# EAGLE board all-in-one (EAGLE 8.0.0)
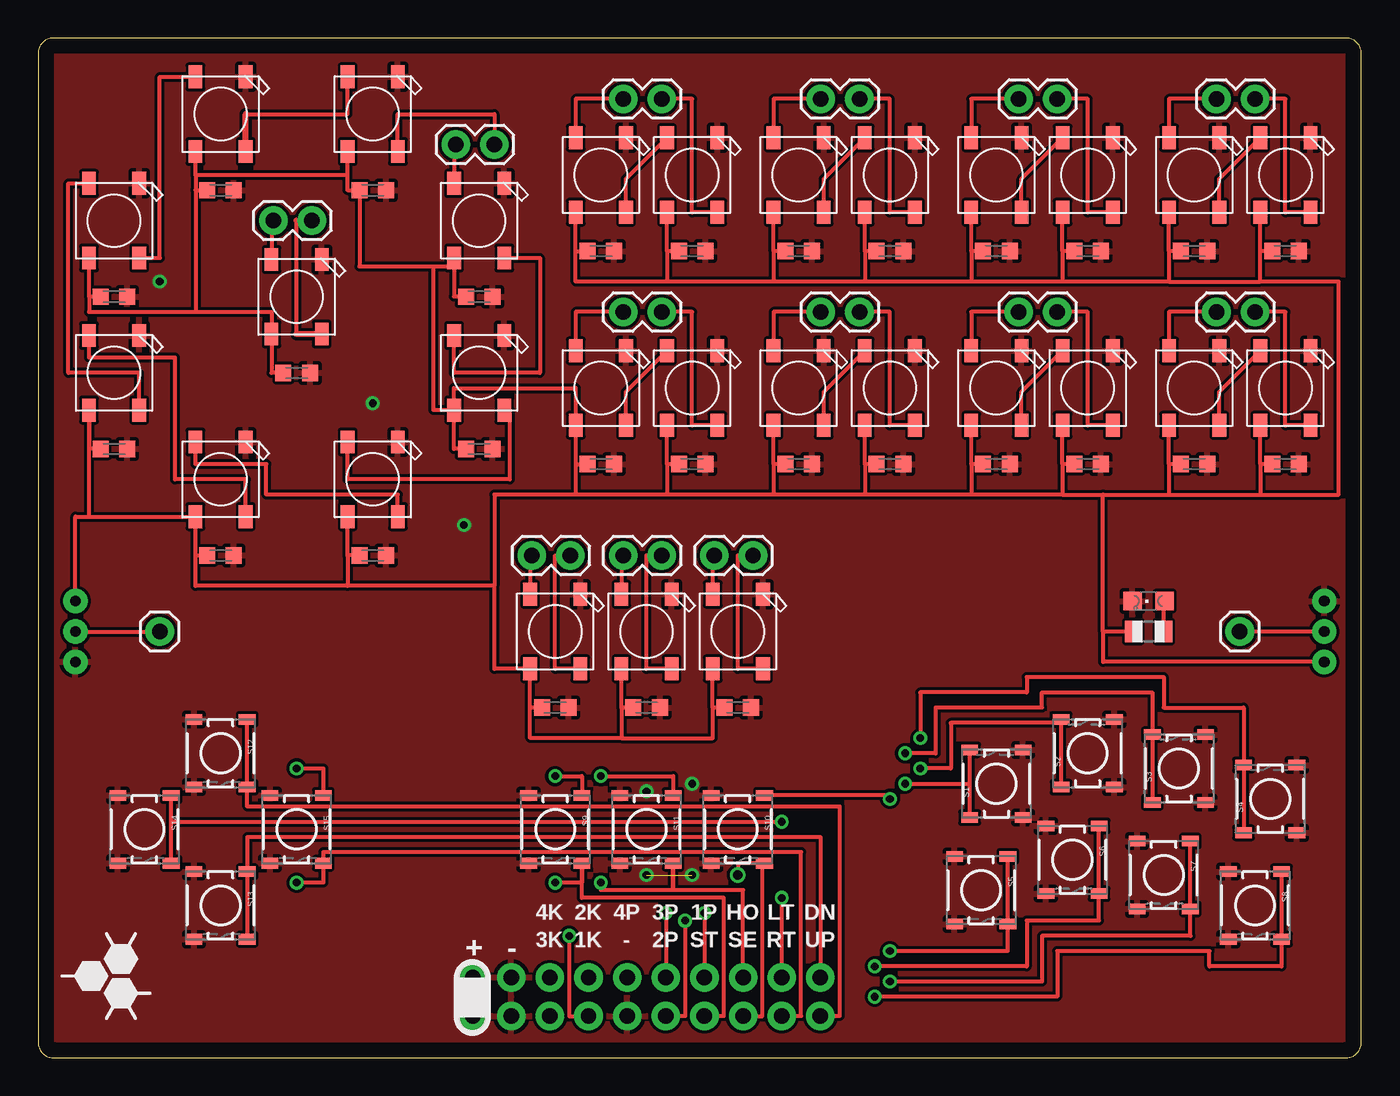
[diagram p0: board, top side]
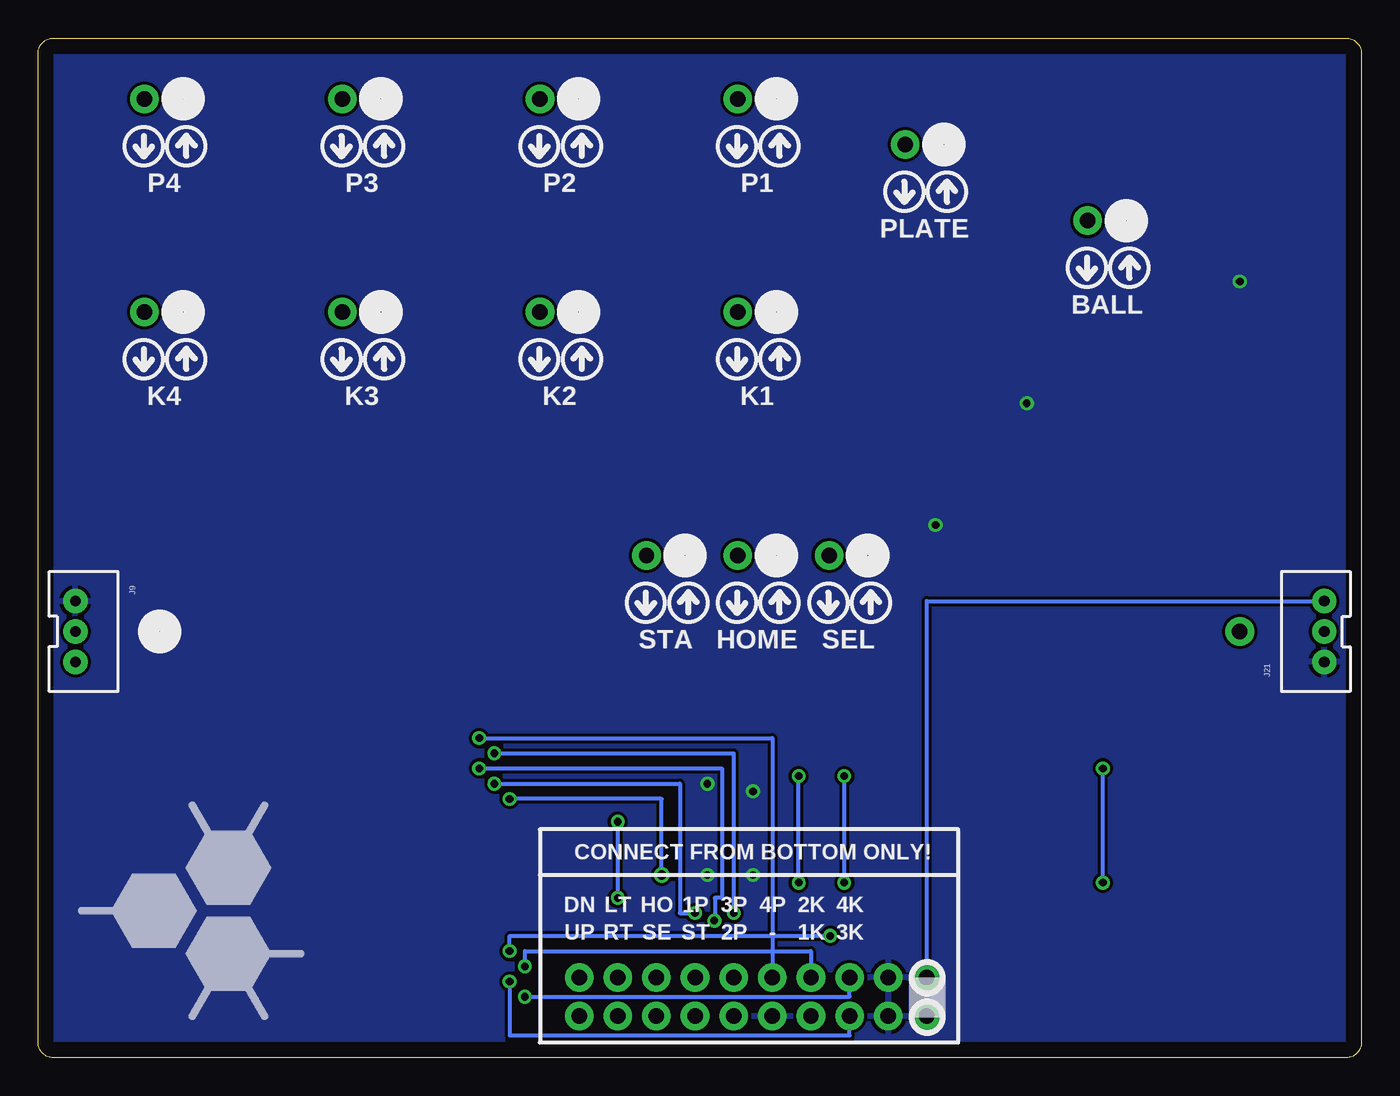
[diagram p1: board, bottom side, seen from below]

Size 87 x 67 mm. Coordinates in mm from the lower left corner, seen from the top.
Outline: 0,66 0,1 arc90 1,0 86,0 arc90 87,1 87,66 arc90 86,67 1,67 arc90 0,66
Copper layers (1*16): Top 0.035mm / dielectric 1.5mm / Bottom 0.035mm
Design rules "default": minimum track width 10mil, minimum drill 24mil, track to track 8mil, track to pad 8mil, pad to pad 8mil, via to via 8mil, smd to smd 8mil, copper to edge 40mil, drill to drill 8mil, minimum pad ring 10mil, minimum via ring 8mil, stop-mask expansion 4mil, vias tented up to drill 0mil, thermal gap 10mil

## Footprints (pad centres in the part's own frame; a part is rotated, then mirrored left to right if it is on the bottom)
C0603K = smd 1.05 x 1.08: 1 -0.875,0; 2 0.875,0
1X02 = drill 1.016 pad 1.88: 1 0,0; 2 2.54,0
JST-3-PTH-VERT = drill 0.7 pad 1.6: 1 -2,-0.55; 2 0,-0.55; 3 2,-0.55
1X01 = drill 1.016 pad 1.88: 1 0,0
WS2812B = smd 1.5 x 0.9: 1-VDD 2.45,-1.65; 2-DOUT 2.45,1.65; 3-GND -2.45,1.65; 4-DIN -2.45,-1.65
CHIPLED_0805 = smd 1.2 x 1.2: A 0,-1.05; C 0,1.05
R0805 = smd 1.1 x 1.4: 1 -1,0; 2 1,0
TACTILE_SWITCH_SMD_4.5MM = smd 0.7 x 1.1: 1 2.225,1.75; 2 2.225,-1.75; 3 -2.225,-1.75; 4 -2.225,1.75
2X10_ROUND_NOSILK = drill 1.016 pad 1.88: 1 -11.43,-1.27; 2 -11.43,1.27; 3 -8.89,-1.27; 4 -8.89,1.27; 5 -6.35,-1.27; 6 -6.35,1.27; 7 -3.81,-1.27; 8 -3.81,1.27; 9 -1.27,-1.27; 10 -1.27,1.27; 11 1.27,-1.27; 12 1.27,1.27; 13 3.81,-1.27; 14 3.81,1.27; 15 6.35,-1.27; 16 6.35,1.27; 17 8.89,-1.27; 18 8.89,1.27; 19 11.43,-1.27; 20 11.43,1.27

## Placement (x,y rotation side)
C1  0.1uf  [C0603K]  37,39 0 top
C2  0.1uf  [C0603K]  43,39 0 top
C3  0.1uf  [C0603K]  37,53 0 top
C4  0.1uf  [C0603K]  43,53 0 top
C5  0.1uf  [C0603K]  50,39 0 top
C6  0.1uf  [C0603K]  56,39 0 top
C7  0.1uf  [C0603K]  50,53 0 top
C8  0.1uf  [C0603K]  56,53 0 top
C9  0.1uf  [C0603K]  63,39 0 top
C10  0.1uf  [C0603K]  69,39 0 top
C11  0.1uf  [C0603K]  63,53 0 top
C12  0.1uf  [C0603K]  69,53 0 top
C13  0.1uf  [C0603K]  76,39 0 top
C14  0.1uf  [C0603K]  82,39 0 top
C15  0.1uf  [C0603K]  76,53 0 top
C16  0.1uf  [C0603K]  82,53 0 top
C17  0.1uf  [C0603K]  34,23 0 top
C18  0.1uf  [C0603K]  46,23 0 top
C19  0.1uf  [C0603K]  40,23 0 top
C20  0.1uf  [C0603K]  17,45 0 top
C21  0.1uf  [C0603K]  29,50 0 top
C22  0.1uf  [C0603K]  29,40 0 top
C23  0.1uf  [C0603K]  22,33 0 top
C24  0.1uf  [C0603K]  12,33 0 top
C25  0.1uf  [C0603K]  5,40 0 top
C26  0.1uf  [C0603K]  5,50 0 top
C27  0.1uf  [C0603K]  12,57 0 top
C28  0.1uf  [C0603K]  22,57 0 top
J1  K1  [1X02]  41,49 180 top
J2  P1  [1X02]  41,63 180 top
J3  K2  [1X02]  54,49 180 top
J4  P2  [1X02]  54,63 180 top
J5  K3  [1X02]  67,49 180 top
J6  P3  [1X02]  67,63 180 top
J7  K4  [1X02]  80,49 180 top
J8  P4  [1X02]  80,63 180 top
J9  led  [JST-3-PTH-VERT]  84,28 270 bottom
J10  DIN  [1X01]  79,28 0 top
J11  START  [1X02]  35,33 180 top
J12  SELECT  [1X02]  47,33 180 top
J13  HOME  [1X02]  41,33 180 top
J14  BALLTOP  [1X02]  18,55 180 top
J15  PLATE  [1X02]  30,60 180 top
J20  DOUT  [1X01]  8,28 0 top
J21  led  [JST-3-PTH-VERT]  3,28 90 bottom
L1  WS2812B  [WS2812B]  37,44 270 top
L2  WS2812B  [WS2812B]  43,44 270 top
L3  WS2812B  [WS2812B]  37,58 270 top
L4  WS2812B  [WS2812B]  43,58 270 top
L5  WS2812B  [WS2812B]  50,44 270 top
L6  WS2812B  [WS2812B]  56,44 270 top
L7  WS2812B  [WS2812B]  50,58 270 top
L8  WS2812B  [WS2812B]  56,58 270 top
L9  WS2812B  [WS2812B]  63,44 270 top
L10  WS2812B  [WS2812B]  69,44 270 top
L11  WS2812B  [WS2812B]  63,58 270 top
L12  WS2812B  [WS2812B]  69,58 270 top
L13  WS2812B  [WS2812B]  76,44 270 top
L14  WS2812B  [WS2812B]  82,44 270 top
L15  WS2812B  [WS2812B]  76,58 270 top
L16  WS2812B  [WS2812B]  82,58 270 top
L17  WS2812B  [WS2812B]  34,28 270 top
L18  WS2812B  [WS2812B]  46,28 270 top
L19  WS2812B  [WS2812B]  40,28 270 top
L20  WS2812B  [WS2812B]  17,50 270 top
L21  WS2812B  [WS2812B]  29,55 270 top
L22  WS2812B  [WS2812B]  29,45 270 top
L23  WS2812B  [WS2812B]  22,38 270 top
L24  WS2812B  [WS2812B]  12,38 270 top
L25  WS2812B  [WS2812B]  5,45 270 top
L26  WS2812B  [WS2812B]  5,55 270 top
L27  WS2812B  [WS2812B]  12,62 270 top
L28  WS2812B  [WS2812B]  22,62 270 top
LED1  [CHIPLED_0805]  73,30 90 top
R1  [R0805]  73,28 0 top
S1  P1  [TACTILE_SWITCH_SMD_4.5MM]  63,18 90 top
S2  P2  [TACTILE_SWITCH_SMD_4.5MM]  69,20 90 top
S3  P3  [TACTILE_SWITCH_SMD_4.5MM]  75,19 90 top
S4  P4  [TACTILE_SWITCH_SMD_4.5MM]  81,17 90 top
S5  K1  [TACTILE_SWITCH_SMD_4.5MM]  62,11 270 top
S6  K2  [TACTILE_SWITCH_SMD_4.5MM]  68,13 270 top
S7  K3  [TACTILE_SWITCH_SMD_4.5MM]  74,12 270 top
S8  K4  [TACTILE_SWITCH_SMD_4.5MM]  80,10 270 top
S9  START  [TACTILE_SWITCH_SMD_4.5MM]  34,15 270 top
S10  SELECT  [TACTILE_SWITCH_SMD_4.5MM]  46,15 270 top
S11  HOME  [TACTILE_SWITCH_SMD_4.5MM]  40,15 270 top
S12  UP  [TACTILE_SWITCH_SMD_4.5MM]  12,20 270 top
S13  DOWN  [TACTILE_SWITCH_SMD_4.5MM]  12,10 270 top
S14  LEFT  [TACTILE_SWITCH_SMD_4.5MM]  7,15 270 top
S15  RIGHT  [TACTILE_SWITCH_SMD_4.5MM]  17,15 270 top
U$1  20 pin breakout  [2X10_ROUND_NOSILK]  40,4 180 top

## Library data of the parts
C1-C28 = rcl
J1-J15 J20 J21 U$1 = SparkFun-Connectors
L1-L28 R1 = adafruit
LED1 = led
S1-S15 = SparkFun-Switches; PROD_ID: SWCH-09213

## Nets
1K: S5.1 S5.4 U$1.14
1P: S1.1 S1.4 U$1.7
2K: S6.1 S6.4 U$1.13
2P: S2.1 S2.4 U$1.10
3K: S7.1 S7.4 U$1.16
3P: S3.1 S3.4 U$1.9
4K: S8.1 S8.4 U$1.15
4P: S4.1 S4.4 U$1.11
DOWN: S13.1 S13.4 U$1.1
GND: C1.2 C2.2 C3.2 C4.2 C5.2 C6.2 C7.2 C8.2 C9.2 C10.2 C11.2 C12.2 C13.2 C14.2 C15.2 C16.2 C17.2 C18.2 C19.2 C20.2 C21.2 C22.2 C23.2 C24.2 C25.2 C26.2 C27.2 C28.2 J9.1 J21.1 L1.3-GND L2.3-GND L3.3-GND L4.3-GND L5.3-GND L6.3-GND L7.3-GND L8.3-GND L9.3-GND L10.3-GND L11.3-GND L12.3-GND L13.3-GND L14.3-GND L15.3-GND L16.3-GND L17.3-GND L18.3-GND L19.3-GND L20.3-GND L21.3-GND L22.3-GND L23.3-GND L24.3-GND L25.3-GND L26.3-GND L27.3-GND L28.3-GND LED1.C S1.2 S1.3 S2.2 S2.3 S3.2 S3.3 S4.2 S4.3 S5.2 S5.3 S6.2 S6.3 S7.2 S7.3 S8.2 S8.3 S9.2 S9.3 S10.2 S10.3 S11.2 S11.3 S12.2 S12.3 S13.2 S13.3 S14.2 S14.3 S15.2 S15.3 U$1.12 U$1.17 U$1.18
HOME: S11.1 S11.4 U$1.5
LEFT: S14.1 S14.4 U$1.3
N$1: J1.2 L1.4-DIN
N$2: J1.1 L2.2-DOUT
N$3: L1.2-DOUT L2.4-DIN
N$4: J20.1 J21.2
N$5: J2.2 L3.4-DIN
N$6: J2.1 L4.2-DOUT
N$7: J3.2 L5.4-DIN
N$8: L5.2-DOUT L6.4-DIN
N$9: J3.1 L6.2-DOUT
N$10: J4.2 L7.4-DIN
N$11: J4.1 L8.2-DOUT
N$12: J5.2 L9.4-DIN
N$13: J5.1 L10.2-DOUT
N$14: J6.2 L11.4-DIN
N$15: J6.1 L12.2-DOUT
N$16: J7.2 L13.4-DIN
N$17: J7.1 L14.2-DOUT
N$18: L9.2-DOUT L10.4-DIN
N$19: L11.2-DOUT L12.4-DIN
N$20: L13.2-DOUT L14.4-DIN
N$21: L15.2-DOUT L16.4-DIN
N$22: L7.2-DOUT L8.4-DIN
N$23: L3.2-DOUT L4.4-DIN
N$24: J8.2 L15.4-DIN
N$25: J8.1 L16.2-DOUT
N$26: J11.1 L17.2-DOUT
N$27: J9.2 J10.1
N$28: J11.2 L17.4-DIN
N$29: J12.2 L18.4-DIN
N$30: J12.1 L18.2-DOUT
N$31: J13.2 L19.4-DIN
N$32: J13.1 L19.2-DOUT
N$33: J14.2 L20.4-DIN
N$34: J14.1 L20.2-DOUT
N$35: J15.2 L21.4-DIN
N$36: J15.1 L28.2-DOUT
N$37: LED1.A R1.2
N$38: L27.2-DOUT L28.4-DIN
N$39: L26.2-DOUT L27.4-DIN
N$40: L25.2-DOUT L26.4-DIN
N$41: L24.2-DOUT L25.4-DIN
N$42: L23.2-DOUT L24.4-DIN
N$43: L22.2-DOUT L23.4-DIN
N$44: L21.2-DOUT L22.4-DIN
RIGHT: S15.1 S15.4 U$1.4
SELECT: S10.1 S10.4 U$1.6
START: S9.1 S9.4 U$1.8
UP: S12.1 S12.4 U$1.2
VCC: C1.1 C2.1 C3.1 C4.1 C5.1 C6.1 C7.1 C8.1 C9.1 C10.1 C11.1 C12.1 C13.1 C14.1 C15.1 C16.1 C17.1 C18.1 C19.1 C20.1 C21.1 C22.1 C23.1 C24.1 C25.1 C26.1 C27.1 C28.1 J9.3 J21.3 L1.1-VDD L2.1-VDD L3.1-VDD L4.1-VDD L5.1-VDD L6.1-VDD L7.1-VDD L8.1-VDD L9.1-VDD L10.1-VDD L11.1-VDD L12.1-VDD L13.1-VDD L14.1-VDD L15.1-VDD L16.1-VDD L17.1-VDD L18.1-VDD L19.1-VDD L20.1-VDD L21.1-VDD L22.1-VDD L23.1-VDD L24.1-VDD L25.1-VDD L26.1-VDD L27.1-VDD L28.1-VDD R1.1 U$1.19 U$1.20

## Tracks (layer width: path | path; a pad name or v marks a point on that pad's centre or on a via)
1K  (via drill 0.5)
  Top 0.254: v34.92,8 34.92,2.73 U$1.14 | v56,7 63.75,7 S5.1 S5.4
  Bottom 0.254: v56,7 56,8 v34.92,8
1P  (via drill 0.5)
  Top 0.254: v43.81,9.5 U$1.7 | S1.4 61.25,18 | v57,18 61.25,18 | 61.25,18 S1.1
  Bottom 0.254: v57,18 44.81,18 44.81,9.5 v43.81,9.5
2K  (via drill 0.5)
  Top 0.254: v55,6 65,6 65,9 69.75,9 S6.1 S6.4
  Bottom 0.254: v55,6 55,7 36.19,7 U$1.13
2P  (via drill 0.5)
  Top 0.254: v58,19 60,19 60,22 67.09,22 S2.1 S2.4 | v42.54,9 42.54,2.73 U$1.10
  Bottom 0.254: v58,19 42.04,19 42.04,10.5 42.5,10.5 42.5,9 v42.54,9
3K  (via drill 0.5)
  Top 0.254: v56,5 66,5 66,8 75.75,8 S7.1 S7.4
  Bottom 0.254: v56,5 56,1.46 33.65,1.46 U$1.16
3P  (via drill 0.5)
  Top 0.254: v57,20 59,20 59,23 66,23 66,24 73.25,24 S3.1 S3.4 | v41.27,9.5 U$1.9
  Bottom 0.254: v57,20 41.27,20 v41.27,9.5
4K  (via drill 0.5)
  Top 0.254: v55,4 67,4 67,7 77,7 77,6 81.75,6 S8.1 S8.4
  Bottom 0.254: v55,4 33.65,4 U$1.15
4P  (via drill 0.5)
  Top 0.254: v58,21 58,24 65,24 65,25 74,25 74,23 79.25,23 S4.1 S4.4
  Bottom 0.254: v58,21 38.73,21 U$1.11
DOWN
  Top 0.254: U$1.1 51.43,14.5 13.75,14.5 S13.4 S13.1
GND  (via drill 0.5)  (1 unrouted)
  other vias: 22,43 28,35 43,12 40,12 43,18 40,17.5 8,51
  pour Top: 1,67 86,67 arc-90 87,66 87,1 arc-90 86,0 1,0 arc-90 0,1 0,66 arc-90
  pour Bottom: 1,67 86,67 arc-90 87,66 87,1 arc-90 86,0 1,0 arc-90 0,1 0,66 arc-90
HOME  (via drill 0.5)
  Top 0.254: U$1.5 46.35,11 41.75,11 | 41.75,11 S11.1 41.75,11 | 41.75,11 37,11 v37,11.5 | v37,18.5 41.75,18.5 S11.4
  Bottom 0.254: v37,11.5 v37,18.5
LEFT  (via drill 0.5)
  Top 0.254: 9,15.5 v48.89,15.5 | 9,15.5 8.9,15.5 | U$1.3 v48.89,10.5 | 9,15.5 8.75,15.5 | 8.75,15.5 S14.4 | S14.1 8.75,15.5 | 8.75,15.5 9,15.5
  Bottom 0.254: v48.89,15.5 v48.89,10.5
N$1
  Top 0.254: J1.2 35.35,49 L1.4-DIN
N$2
  Top 0.254: L2.2-DOUT 43,41.55 43,49 J1.1
N$3
  Top 0.254: L1.2-DOUT 38.65,43.75 L2.4-DIN
N$4
  Top 0.254: J21.2 J20.1
N$5
  Top 0.254: J2.2 35.35,63 L3.4-DIN
N$6
  Top 0.254: L4.2-DOUT 43,55.55 43,63 J2.1
N$7
  Top 0.254: J3.2 48.35,49 L5.4-DIN
N$8
  Top 0.254: L5.2-DOUT 51.65,43.75 L6.4-DIN
N$9
  Top 0.254: L6.2-DOUT 56,41.55 56,49 J3.1
N$10
  Top 0.254: J4.2 48.35,63 L7.4-DIN
N$11
  Top 0.254: L8.2-DOUT 56,55.55 56,63 J4.1
N$12
  Top 0.254: J5.2 61.35,49 L9.4-DIN
N$13
  Top 0.254: L10.2-DOUT 69,41.55 69,49 J5.1
N$14
  Top 0.254: J6.2 61.35,63 L11.4-DIN
N$15
  Top 0.254: L12.2-DOUT 69,55.55 69,63 J6.1
N$16
  Top 0.254: J7.2 74.35,49 L13.4-DIN
N$17
  Top 0.254: L14.2-DOUT 82,41.55 82,49 J7.1
N$18
  Top 0.254: L9.2-DOUT 64.65,43.75 L10.4-DIN
N$19
  Top 0.254: L11.2-DOUT 64.65,57.75 L12.4-DIN
N$20
  Top 0.254: L13.2-DOUT 77.65,43.75 L14.4-DIN
N$21
  Top 0.254: L15.2-DOUT 77.65,57.75 L16.4-DIN
N$22
  Top 0.254: L7.2-DOUT 51.65,57.75 L8.4-DIN
N$23
  Top 0.254: L3.2-DOUT 38.65,57.75 L4.4-DIN
N$24
  Top 0.254: J8.2 74.35,63 L15.4-DIN
N$25
  Top 0.254: L16.2-DOUT 82,55.55 82,63 J8.1
N$26
  Top 0.254: L17.2-DOUT 34,25.55 34,33 J11.1
N$27
  Top 0.254: J9.2 J10.1
N$28
  Top 0.254: J11.2 32.35,33 L17.4-DIN
N$29
  Top 0.254: J12.2 44.35,33 L18.4-DIN
N$30
  Top 0.254: L18.2-DOUT 46,25.55 46,33 J12.1
N$31
  Top 0.254: J13.2 38.35,33 L19.4-DIN
N$32
  Top 0.254: L19.2-DOUT 40,25.55 40,33 J13.1
N$33
  Top 0.254: J14.2 15.35,55 L20.4-DIN
N$34
  Top 0.254: 17,47.55 17,55
  Top 0.406: L20.2-DOUT 17,47.55 | 17,55 J14.1
N$35
  Top 0.254: J15.2 27.35,60 L21.4-DIN
N$36
  Top 0.254: L28.2-DOUT 23.65,62 30,62 J15.1
N$37
  Top 0.254: R1.2 74,30 LED1.A
N$38
  Top 0.254: L28.4-DIN 20.35,62 13.65,62
  Top 0.406: L27.2-DOUT 13.65,62
N$39
  Top 0.254: L26.2-DOUT 8,52.55 8,64.45 L27.4-DIN
N$40
  Top 0.254: L25.2-DOUT 6.65,45 2,45 2,57.45 L26.4-DIN
N$41
  Top 0.254: L24.2-DOUT 13.65,38 9,38 9,46 3.35,46 L25.4-DIN
N$42
  Top 0.254: L23.2-DOUT 23.65,37 15,37 15,39 10.35,39 L24.4-DIN
N$43
  Top 0.254: L22.2-DOUT 31,42.55 31,38 20.35,38 L23.4-DIN
N$44
  Top 0.254: L21.2-DOUT 33,52.55 33,45 27.35,45 L22.4-DIN
RIGHT  (via drill 0.5)
  Top 0.254: U$1.4 50.16,2.73 50.16,13.5 18.75,13.5 S15.1 18.75,11.5 v17,11.5 | v17,19 18.75,19 S15.4
  Bottom 0.254: v17,11.5 v17,19
SELECT  (via drill 0.5, 0.6)
  Top 0.254: U$1.6 47.62,2.73 47.62,12 | 47.62,12 47.62,12.21 | 47.62,12 47.62,12.78 S10.1 46,12.78 v46,12 | v56,17 56,17.23 S10.4
  Bottom 0.254: v46,12 46,17 v56,17
START  (via drill 0.5)
  Top 0.254: U$1.8 45.08,2.73 45.08,10.5 35.75,10.5 S9.1 35.75,11.5 v34,11.5 | v34,18.5 35.75,18.5 S9.4
  Bottom 0.254: v34,11.5 v34,18.5
UP
  Top 0.254: U$1.2 52.7,2.73 52.7,16.5 13.75,16.5 S12.1 S12.4
VCC
  Top 0.254: C16.1 80.35,53 | 80.35,53 L16.1-VDD | C15.1 74.35,53 | 74.35,53 L15.1-VDD | C12.1 67.35,53 | 67.35,53 L12.1-VDD | C11.1 61.35,53 | 61.35,53 L11.1-VDD | C8.1 54.35,53 | 54.35,53 L8.1-VDD | C7.1 48.35,53 | 48.35,53 L7.1-VDD | C4.1 41.35,53 | 41.35,53 L4.1-VDD | 35.35,53 C3.1 | 35.35,53 L3.1-VDD | 35.35,39 C1.1 | 35.35,39 L1.1-VDD 35.35,44 27.35,44 L22.1-VDD | C2.1 41.35,39 | 41.35,39 L2.1-VDD | C5.1 48.35,39 | 48.35,39 L5.1-VDD | C6.1 54.35,39 | 54.35,39 L6.1-VDD | C9.1 61.35,39 | 61.35,39 L9.1-VDD | C10.1 67.35,39 | 67.35,39 L10.1-VDD | C13.1 74.35,39 | 74.35,39 L13.1-VDD | C14.1 80.35,39 | 80.35,39 L14.1-VDD | C21.1 27.35,50 27.35,52 | 27.35,52 L21.1-VDD | C22.1 27.35,40 L22.1-VDD | 20.35,58 20.35,57 C28.1 21.12,52 26,52 | 20.35,58 L28.1-VDD | 10.35,57 C27.1 | 10.35,58 10.35,57 | 10.35,58 L27.1-VDD | C26.1 3.35,50 | 3.35,50 L26.1-VDD | C25.1 3.35,40 L25.1-VDD 3.35,35.55 | 10.35,33 C24.1 | 10.35,33 L24.1-VDD 3.35,35.55 | C23.1 20.35,33 | 20.35,33 L23.1-VDD | C20.1 15.35,45 L20.1-VDD 15.35,49 10.35,49 | C17.1 32.35,23 | 32.35,23 L17.1-VDD 30,25.55 30,31 | C19.1 38.35,23 | 38.35,23 L19.1-VDD | C18.1 44.35,23 | 44.35,23 L18.1-VDD | U$1.20 U$1.19 | 80.35,39 80.35,37 | 35.35,39 35.35,37 | 48.35,37 41.35,37 | 54.35,37 48.35,37 | 61.35,37 54.35,37 | 67.35,37 61.35,37 | 67.35,37 70,37 | 74.35,37 80.35,37 | 41.35,37 35.35,37 | 41.35,39 41.35,37 | 48.35,39 48.35,37 | 54.35,39 54.35,37 | 61.35,39 61.35,37 | 67.35,39 67.35,37 | 74.35,39 74.35,37 | 80.35,51 80.35,53 | 35.35,53 35.35,51 41.35,51 | 48.35,51 41.35,51 | 54.35,51 48.35,51 | 61.35,51 54.35,51 | 67.35,51 61.35,51 | 74.35,51 67.35,51 | 74.35,51 80.35,51 | 41.35,53 41.35,51 | 48.35,53 48.35,51 | 54.35,53 54.35,51 | 61.35,53 61.35,51 | 67.35,53 67.35,51 | 74.35,53 74.35,51 | L22.1-VDD 26,42.55 26,52
  Top 0.254: 26,52 27.35,52 | 20.35,58 10.35,58 | 3.35,50 3.35,49 10.35,49 | 10.35,57 10.35,49 | 20.35,33 20.35,31 | 10.35,33 10.35,31 20.35,31 | 30,31 20.35,31 | J21.3 2.45,35.55 3.35,35.55 | 44.35,23 44.35,21 38.35,21 | 32.35,23 32.35,21 38.35,21 | 38.35,23 38.35,21 | 80.35,37 85.5,37 85.5,51 80.35,51 | J9.3 70,26 70,28 | 70,28 70,37 | 35.35,37 30,37 30,31 | 70,37 74.35,37 | R1.1 70,28
  Bottom 0.254: U$1.19 28.57,30 J21.3

## Text on the board
tPlace: + | - | 4K / 3K | 2K / 1K | 4P / - | 3P / 2P | 1P / ST | HO / SE | LT / RT | DN / UP
bPlace: P1 | P2 | P3 | P4 | PLATE | BALL | K1 | K2 | K3 | K4 | SEL | HOME | STA | CONNECT FROM BOTTOM ONLY! | 4K / 3K | 2K / 1K | 4P / - | 3P / 2P | 1P / ST | HO / SE | LT / RT | DN / UP